# Altium PCB SensorBoard.PcbDoc
Units mm, origin at the board's own origin, x right, y up, seen from the top; angles counter-clockwise.
Board outline 114.43 x 32.64 mm, 4 copper layers (Top Layer, DGND, Power, Bottom Layer), stack 1.509 mm thick; 66 components, 54 nets, 245 pads, 243 vias.
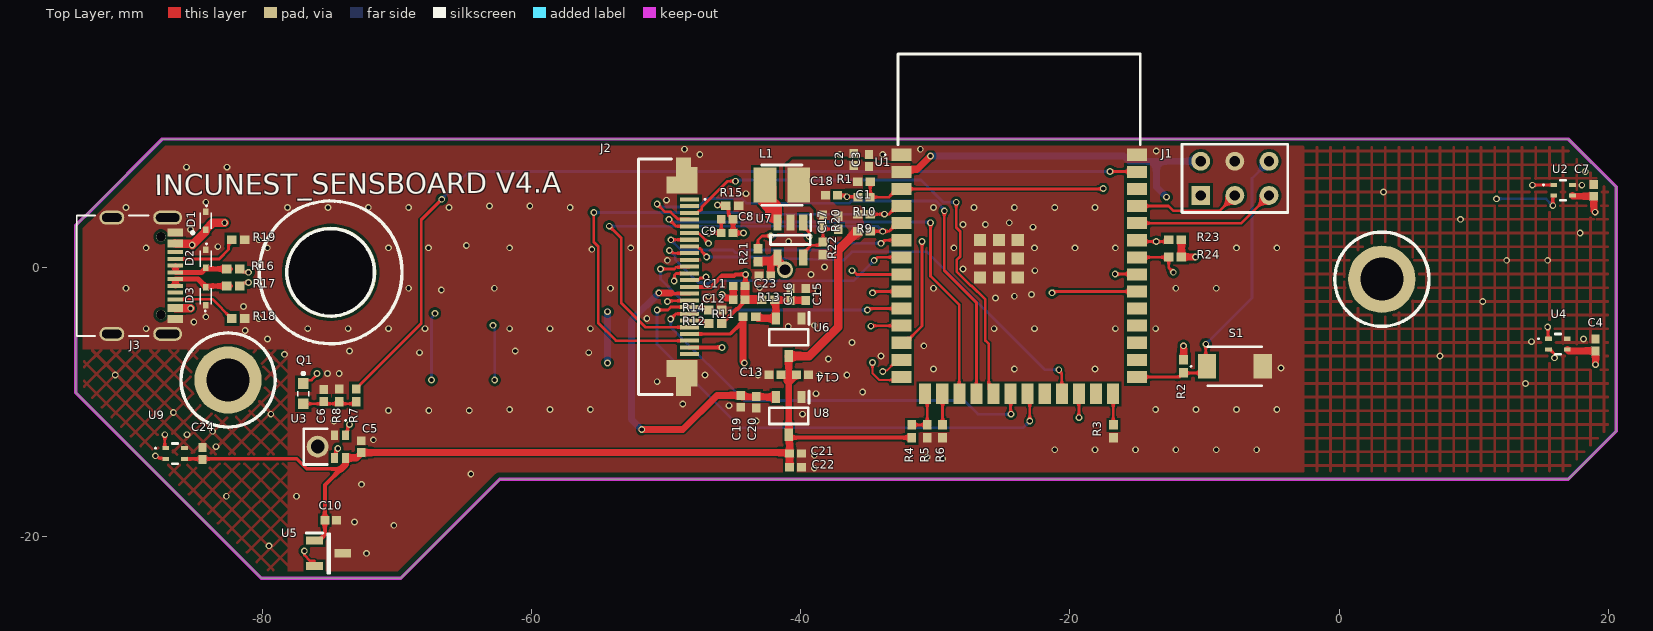
[diagram p0: Top Layer view]
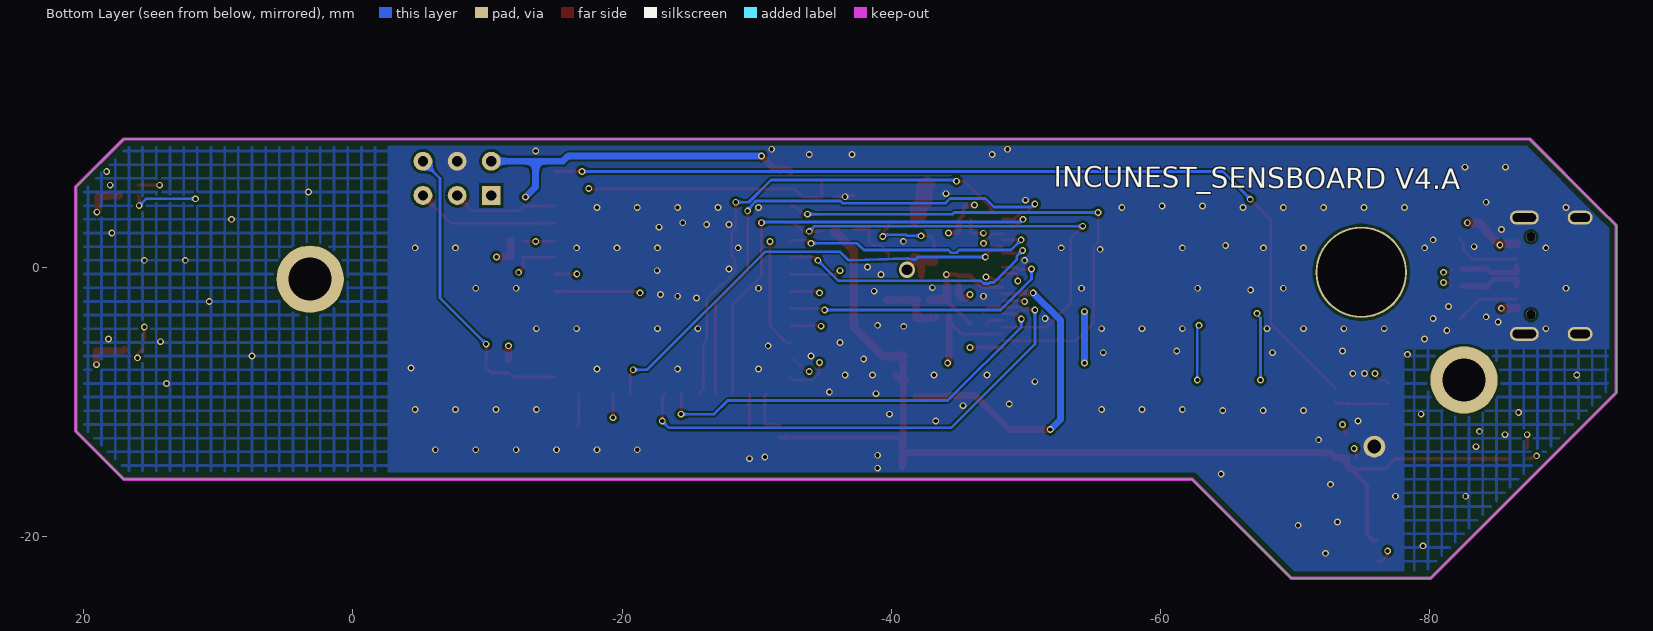
[diagram p1: Bottom Layer view, seen from below]
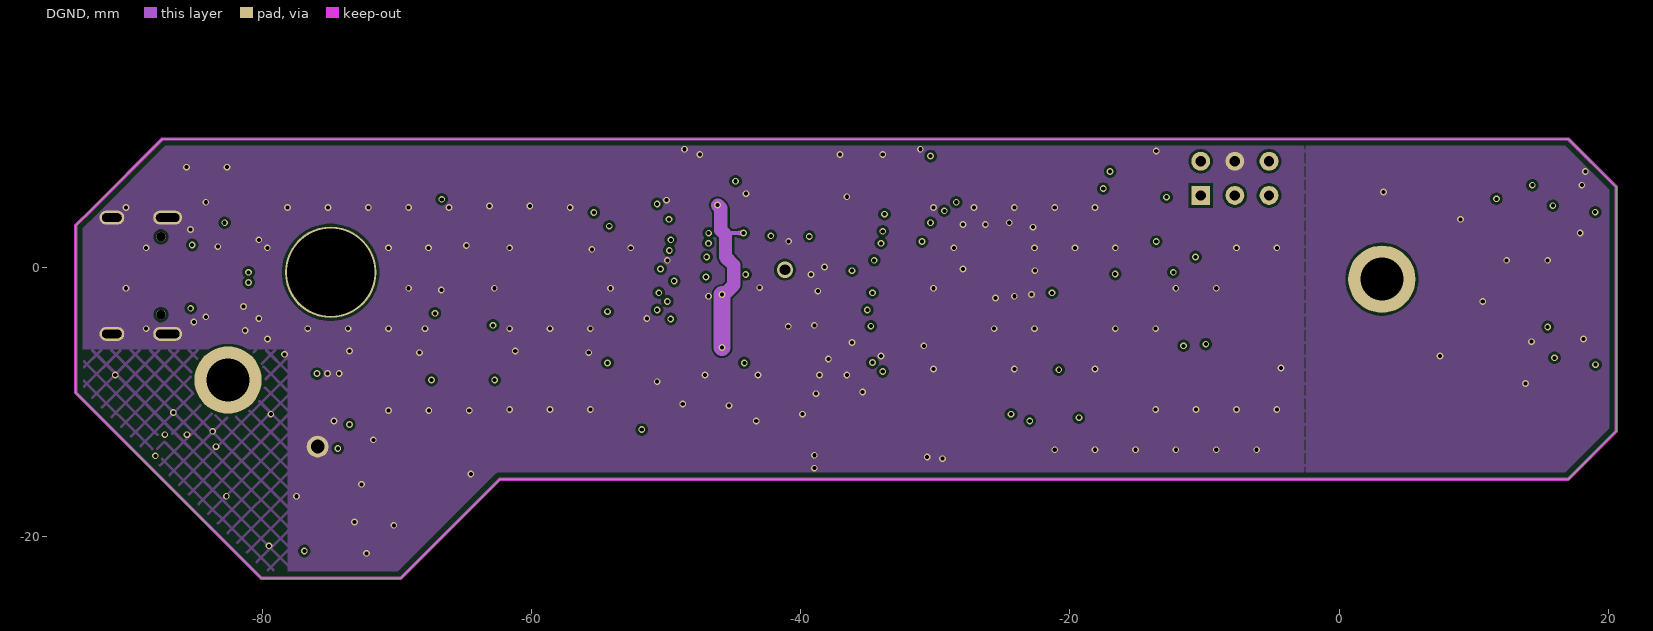
[diagram p2: DGND]
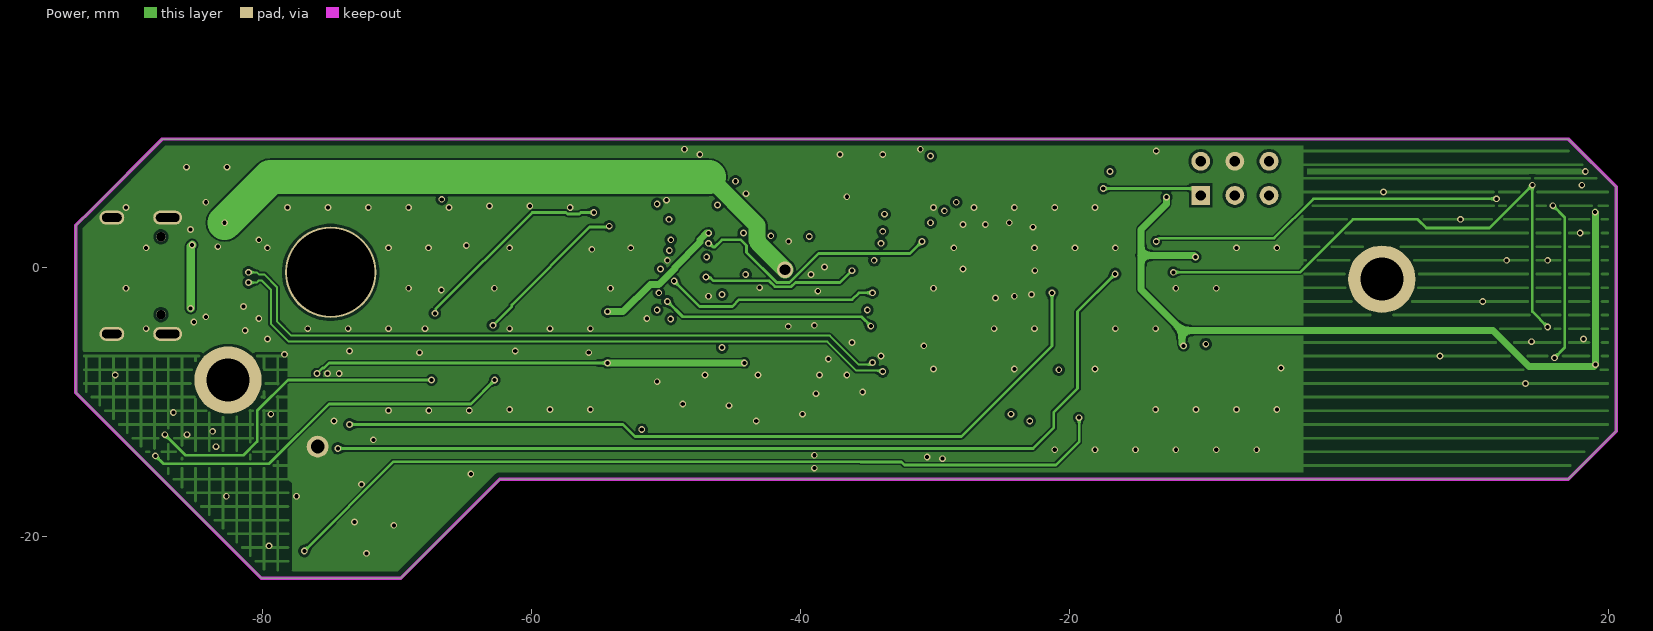
[diagram p3: Power]

## Layer stack, top to bottom
Top Solder: solder mask 0.0102, Solder Resist, Dk 3.5
Top Layer: signal copper 0.0356
Dielectric 2: prepreg 0.0711, PP-006, Dk 4.1
DGND: signal copper 0.0152
Dielectric 1: dielectric 1.265, FR-4, Dk 4.8
Power: signal copper 0.0152
Dielectric 3: prepreg 0.0711, PP-006, Dk 4.1
Bottom Layer: signal copper 0.0356
Bottom Solder: solder mask 0.0102, Solder Resist, Dk 3.5

## Board outline
-93.853,-9.335 -93.853,3.111 -92.647,4.318 -87.439,9.525 17.018,9.525 20.574,5.969 20.574,-12.192 17.018,-15.748 -62.357,-15.748 -69.723,-23.114 -80.074,-23.114 -87.439,-15.748 -92.647,-10.541

## Design rules (kind name [scope] priority, off if disabled: settings)
AssemblyTestPointUsage AssemblyTestPointUsage_1 [All] p2:
AssemblyTestpoint AssemblyTestpoint_1 [All] p2: testpointundercomponent=TRUE minsize=1.016 maxsize=2.54 preferedsize=1.524 minholesize=0 maxholesize=1.016 preferedholesize=0.813 testpointgrid=0.025 usegrid=TRUE gridtolerance=0 allowsidetop=TRUE allowsidebottom=TRUE
Clearance "Board outline clearance" [All vs OnLayer('Keep-Out Layer')] p1: gap=0.381 ignorepadtopadclearanceinfootprint=FALSE except(0: Arc-Hole Track-Hole SMDPad-Hole THPad-Hole Via-Hole Fill-Hole Poly-Hole Region-Hole Text-Hole)
Clearance Clearance_1 [All] p2: gap=0.2 ignorepadtopadclearanceinfootprint=FALSE except(0: Arc-Text Track-Text SMDPad-Text THPad-Text Via-Text Fill-Text Poly-Text Region-Text Text-Text; 0.102: Arc-Arc Arc-Track Arc-SMDPad Track-Track Track-SMDPad; 0.127: Arc-THPad Arc-Via Arc-Fill Arc-Poly Arc-Region Arc-Hole Track-THPad Track-Via Track-Fill Track-Poly Track-Region Track-Hole SMDPad-Hole THPad-Hole; 0.152: SMDPad-SMDPad; 0.203: SMDPad-THPad THPad-THPad; 0.254: Via-Via)
ComponentClearance [InComponent('L1')] p1: gap=0 collisioncheckmode=3 verticalgap=0.254 showdistances=FALSE
ComponentClearance UFL [InComponent('RF_CON1')] p2: gap=0 collisioncheckmode=3 verticalgap=0.254 showdistances=FALSE
ComponentClearance ComponentClearance_1 [All] p3: gap=0.254 collisioncheckmode=3 verticalgap=0.254 showdistances=FALSE
DiffPairsRouting DiffPairsRouting_1 [InDifferentialPair('D')] p1: maxlimit=0.3 minlimit=0.127 mostfreqgap=0.3 toplayer_minwidth=0.102 toplayer_maxwidth=0.148 toplayer_prefwidth=0.127 midlayer1_minwidth=0.076 midlayer1_maxwidth=0.381 midlayer1_prefwidth=0.127 midlayer2_minwidth=0.076 midlayer2_maxwidth=0.381 midlayer2_prefwidth=0.127 bottomlayer_minwidth=0.102 bottomlayer_maxwidth=0.148 bottomlayer_prefwidth=0.127 impedanceprofiledriven=TRUE impedanceprofileid={7D7D2639-810E-47C2-98E1-721D41EDD626} maxuncoupledlength=12.7
FabricationTestPointUsage FabricationTestPointUsage_1 [All] p2: valid=0 allowmultiple=FALSE
FabricationTestpoint FabricationTestpoint_1 [All] p2: side=3 testpointundercomponent=TRUE minsize=1.016 maxsize=2.54 preferedsize=1.524 minholesize=0 maxholesize=1.016 preferedholesize=0.813 testpointgrid=0.025 allowsidetop=TRUE allowsidebottom=TRUE usegrid=TRUE gridtolerance=0
FanoutControl Fanout_LCC [IsLCC] p1: bgadir=Out bgaviamode=Centered fanoutstyle=Auto fanoutdirection=Alternating viagrid=0.025 // Fanout_LCC (Default Rule)
FanoutControl Fanout_BGA [IsBGA] p2: bgadir=Out bgaviamode=Centered fanoutstyle=Auto fanoutdirection=Alternating viagrid=0.025 // Fanout_BGA (Default Rule)
FanoutControl Fanout_Small [(CompPinCount < 5)] p3: bgadir=Out bgaviamode=Centered fanoutstyle=Auto fanoutdirection=OutThenIn viagrid=0.025 // Fanout_Small (Default Rule)
FanoutControl Fanout_SOIC [IsSOIC] p4: bgadir=Out bgaviamode=Centered fanoutstyle=Auto fanoutdirection=Alternating viagrid=0.025 // Fanout_SOIC (Default Rule)
FanoutControl Fanout_BGA_1 [IsBGA] p6: bgadir=Out bgaviamode=Centered fanoutstyle=Auto fanoutdirection=Alternating viagrid=0.025 // Fanout_BGA (Default Rule)
FanoutControl Fanout_LCC_1 [IsLCC] p7: bgadir=Out bgaviamode=Centered fanoutstyle=Auto fanoutdirection=Alternating viagrid=0.025 // Fanout_LCC (Default Rule)
FanoutControl Fanout_SOIC_1 [IsSOIC] p8: bgadir=Out bgaviamode=Centered fanoutstyle=Auto fanoutdirection=Alternating viagrid=0.025 // Fanout_SOIC (Default Rule)
FanoutControl Fanout_Small_1 [(CompPinCount < 5)] p9: bgadir=Out bgaviamode=Centered fanoutstyle=Auto fanoutdirection=OutThenIn viagrid=0.025 // Fanout_Small (Default Rule)
FanoutControl Fanout_Default_1 [All] p10: bgadir=Out bgaviamode=Centered fanoutstyle=Auto fanoutdirection=Alternating viagrid=0.025 // Fanout_Default (Default Rule)
Height Height_1 [All] p1: minheight=0 maxheight=50 prefheight=12.7
HoleSize HoleSize_1 [All] p1: absolutevalues=TRUE maxlimit=15 minlimit=0.2 maxpercent=80.000 minpercent=20.000
HoleToHoleClearance u8 [All vs InComponent('u8_1')] p1: gap=0 allowstackedmicrovias=TRUE
HoleToHoleClearance [All] p2: gap=0.254 allowstackedmicrovias=TRUE
LayerPairs LayerPairs_1 [All] p1: enforce=TRUE
MinimumAnnularRing [All] p1: minimumring=0.1
MinimumSolderMaskSliver MinimumSolderMaskSliver_1 [All] p1 off: minsoldermaskwidth=0.2
NetAntennae NetAntennae_1 [All] p2: netantennaetolerance=0
PasteMaskExpansion PasteMaskExpansion_1 [All] p2: expansion=0
PlaneClearance PlaneClearance_1 [All] p1: clearance=0.508
PlaneConnect PlaneConnect_1 [All] p1: planeconnectstyle=Direct reliefexpansion=0.508 reliefentries=4 reliefconductorwidth=0.7 reliefairgap=0.254
PolygonConnect [All] p1: connectstyle=Direct reliefconductorwidth=0.508 reliefentries=4 polygonreliefangle="90 Angle" airgapwidth=0.254
RoutingCorners RoutingCorners_1 [All] p2: cornerstyle=45-Degree minsetback=2.54 maxsetback=2.54
RoutingLayers RoutingLayers_1 [All] p2: top layer_v5=TRUE mid layer 1_v5=TRUE mid layer 2_v5=TRUE bottom layer_v5=TRUE
RoutingPriority RoutingPriority_1 [All] p2: routingpriority=0
RoutingTopology RoutingTopology_1 [All] p2: topology=Shortest
RoutingVias RoutingVias_1 [All] p1: holewidth=0.3 width=0.5 viastyle="Through Hole" minholewidth=0.2 minwidth=0.4 maxholewidth=0.711 maxwidth=1.27
ShortCircuit ShortCircuit_Antenna [InComponent('J1')] p1: allowed=TRUE
ShortCircuit ShortCircuit_1 [All] p2: allowed=FALSE
SilkToSilkClearance SilkToSilkClearance_1 [All] p1: silktosilkclearance=0
SilkToSolderMaskClearance SilkToSolderMaskClearance_1 [IsPad] p1: minsilkscreentomaskgap=0 clearancetoexposedcopper=TRUE
SolderMaskExpansion [All] p1: expansion=0.102 istentingtop=FALSE
SolderMaskExpansion SolderMaskExpansion_1 [All] p2: expansion=0.102 istentingtop=FALSE
SupplyNets "Schematic Supply Nets_10" [InNet('2v8_ANA@150mA')] p1: voltage=0.000
SupplyNets "Schematic Supply Nets_9" [InNet('3v3_dig@2A')] p2: voltage=0.000
SupplyNets "Schematic Supply Nets_8" [InNet('1v5_dig@60mA')] p3: voltage=0.000
SupplyNets "Schematic Supply Nets_7" [InNet('AGND')] p4: voltage=0.000
SupplyNets "Schematic Supply Nets_6" [InNet('5V@2A')] p5: voltage=0.000
SupplyNets "Schematic Supply Nets_5" [InNet('2v8_dig@150mA')] p6: voltage=0.000
SupplyNets "Schematic Supply Nets_4" [InNet('2v8_DO_dig@150mA')] p7: voltage=0.000
SupplyNets "Schematic Supply Nets" [InNet('DGND')] p8: voltage=0.000
UnRoutedNet UnRoutedNet_1 [All] p1:
UnpouredPolygon UnpouredPolygon_1 [All] p2:
Width Width_1 [All] p1: maxlimit=8 minlimit=0.1 preferedwidth=0.2
13 further rules are at their usual default settings.

## Classes and differential pairs
component class U_Sensors: C4 C5 C6 C7 C8 C9 C10 C11 C12 C24 J2 Q1 R7 R8 R9 R10 R11 R12 R13 R14 R15 R23 R24 U2 U3 U4 U5 U9
component class U_PowerManagement: C13 C14 C15 C16 C17 C18 C19 C20 C21 C22 C23 C96 C97 D1 D2 D3 J3 L1 R16 R17 R18 R19 R20 R21 R22 U6 U7 U8
differential pair class USB: D USB
component class U_uC: C1 C2 C3 J1 R1 R2 R3 R4 R5 R6 S1 U1
differential pair USB: +USB_P -USB_N
differential pair D: +D_P -D_N

## Components (designator, comment, footprint, x,y, rotation, side; value= is the part's Value field where it differs from the comment)
C1 "1uF 0402 X5R 50V" CAPC1005X55X25NL5T10 -35.306,5.207 r0 top
C2 "10uF 0402 X5R 10V" CAPC1005X55X25NL5T10 -36.068,8.001 r270 top
C3 "100nF 0402 X7R 50V" CAPC1005X55X25NL5T10 -34.925,7.933 r270 top
C4 "100nF 0402 X7R 50V" CAPC1005X55X25NL5T10 19.05,-5.774 r270 top
C5 "100nF 0402 X7R 50V" CAPC1005X55X25NL5T10 -72.644,-13.335 r270 top
C6 "100nF 0402 X7R 50V" CAPC1005X55X25NL5T10 -75.438,-9.525 r90 top
C7 "100nF 0402 X7R 50V" CAPC1005X55X25NL5T10 18.923,5.715 r270 top
C8 "100nF 0402 X7R 50V" CAPC1005X55X25NL5T10 -45.466,3.556 r180 top
C9 "10uF 0402 X5R 10V" CAPC1005X55X25NL5T10 -45.466,2.54 r0 top
C10 "100nF 0402 X7R 50V" CAPC1005X55X25NL5T10 -74.921,-18.797 r180 top
C11 "100nF 0402 X7R 50V" CAPC1005X55X25NL5T10 -44.577,-1.397 r0 top
C12 "10uF 0402 X5R 10V" CAPC1005X55X25NL5T10 -44.577,-2.413 r180 top
C13 "100nF 0402 X7R 50V" CAPC1005X55X25NL5T10 -41.91,-8.001 r0 top
C14 "1uF 0402 X5R 50V" CAPC1005X55X25NL5T10 -39.878,-8.001 r180 top
C15 "100nF 0402 X7R 50V" CAPC1005X55X25NL5T10 -39.624,-2.032 r270 top
C16 "1uF 0402 X5R 50V" CAPC1005X55X25NL5T10 -40.767,-2.032 r270 top
C17 "22pF 0402 X5R 10V" CAPC1005X55X25NL5T10 -38.354,3.429 r270 top
C18 "10uF 0402 X5R 10V" CAPC1005X55X25NL5T10 -37.719,5.334 r0 top
C19 "100nF 0402 X7R 50V" CAPC1005X55X25NL5T10 -44.45,-9.965 r90 top
C20 "1uF 0402 X5R 50V" CAPC1005X55X25NL5T10 -43.307,-10.033 r90 top
C21 "100nF 0402 X7R 50V" CAPC1005X55X25NL5T10 -40.386,-13.843 r180 top
C22 "1uF 0402 X5R 50V" CAPC1005X55X25NL5T10 -40.386,-14.859 r180 top
C23 "10uF 0402 X5R 10V" CAPC1005X55X25NL5T10 -42.672,-0.635 r180 top
C24 "100nF 0402 X7R 50V" CAPC1005X55X25NL5T10 -84.455,-13.843 r270 top
D1 "LESD5D5.0CT1G" LESD5D50CT1G -84.201,3.454 r270 top
D2 "LESD5D5.0CT1G" LESD5D50CT1G -84.201,0.635 r270 top
D3 "LESD5D5.0CT1G" LESD5D50CT1G -84.201,-2.159 r90 top
J1 "Samtec SLW-103-01-T-D" PCB-37z8hw1ej4f71bosen9e-1 -10.287,5.334 r90 top
J2 "SFV24R-1STE1HLF" SFV24R1STE1HLF -49.96,-0.71 r270 top
J3 "KH-TYPE-C-16P" KINGHELM_KH-TYPE-C-16P -91.186,-0.635 r270 top
L1 "SWPA3015S2R2NT" INDPM3030X150N -41.402,6.096 r0 top
Q1 "ALS-PT19-315C_L177_TR8" ALSPT19315CL177TR8 -76.962,-9.398 r270 top
R1 "10k 0402 0.1%" RESC1005X40X25ML05T10 -35.306,6.35 r180 top
R2 "10k 0402 0.1%" RESC1005X40X25ML05T10 -11.557,-7.366 r90 top
R3 "10k 0402 0.1%" RESC1005X40X25ML05T10 -16.764,-12.192 r90 top
R4 "10k 0402 0.1%" RESC1005X40X25ML05T10 -31.75,-12.192 r270 top
R5 "0R 0402 1%" RESC1005X40X25ML05T10 -30.607,-12.192 r270 top
R6 "10k 0402 0.1%" RESC1005X40X25ML05T10 -29.464,-12.192 r90 top
R7 "1k 0402 1%" RESC1005X40X25ML05T10 -73.025,-9.525 r90 top
R8 "100k 0402 1%" RESC1005X40X25ML05T10 -74.295,-9.525 r90 top
R9 "4k7 0402 1%" RESC1005X40X25ML05T10 -35.306,2.667 r0 top
R10 "4k7 0402 1%" RESC1005X40X25ML05T10 -35.306,3.937 r0 top
R11 "0R 0402 1%" RESC1005X40X25ML05T10 -43.815,-3.683 r0 top
R12 "10k 0402 0.1%" RESC1005X40X25ML05T10 -46.355,-4.191 r0 top
R13 "0R 0402 1%" RESC1005X40X25ML05T10 -42.418,-2.413 r0 top
R14 "10k 0402 0.1%" RESC1005X40X25ML05T10 -46.355,-3.175 r0 top
R15 "0R 0402 1%" RESC1005X40X25ML05T10 -45.085,4.572 r180 top
R16 "33R 0402 1%" RESC1005X40X25ML05T10 -82.169,-0.127 r0 top
R17 "33R 0402 1%" RESC1005X40X25ML05T10 -82.169,-1.397 r0 top
R18 "5k1 0402 1%" RESC1005X40X25ML05T10 -81.788,-3.81 r180 top
R19 "5k1 0402 1%" RESC1005X40X25ML05T10 -81.788,2.032 r180 top
R20 "680k 0402 1%" RESC1005X40X25ML05T10 -37.211,3.302 r270 top
R21 "10k 0402 1%" RESC1005X40X25ML05T10 -43.18,0.889 r90 top
R22 "150k 0402 1%" RESC1005X40X25ML05T10 -38.354,1.397 r270 top
R23 "4k7 0402 1%" RESC1005X40X25ML05T10 -12.192,2.032 r180 top
R24 "4k7 0402 1%" RESC1005X40X25ML05T10 -12.192,0.762 r180 top
S1 "TS-1088-AR02016" TS1088AR02016 -7.747,-7.366 r0 top
U1 "ESP32-S3-WROOM-1-N16R8" ESP32S3WROOM1N16R8 -23.776,3.095 r0 top
U2 "SHT40-AD1B-R3" SHT40AD1BR3 16.637,5.715 r0 top
U3 "ICS-41350" ICS41352 -75.184,-13.335 r180 top
U4 "SHT40-CD1B-R3" SHT40CD1BR3 16.256,-5.715 r0 top
U5 "DRV5032FBDBZR" SOT95P237X95-3N -75.073,-21.255 r0 top
U6 "XC6206P282MR-G" SOT95P280X130-3N -40.894,-5.207 r270 top
U7 "SY8088AAC" SOT95P285X140-5N -40.767,2.032 r270 top
U8 "XC6206P152MR-G" SOT95P280X130-3N -40.894,-11.049 r270 top
U9 "SHT40-AD1B-R3" SHT40AD1BR3 -86.487,-13.843 r0 top

## Footprints (in the part's own frame and the unit in brackets; to place one, negate y for a bottom-side part, rotate by r counter-clockwise, add the part's x,y. Pads: shape width x height; smd on the part's side, far side on the other; paste and mask are expansions set on the pad)
ALSPT19315CL177TR8 [mm]
  rect 0.8x0.8 smd: 1(-0.75,0) 2(0.75,0)
  silkscreen extent -1.6,-0.4 0.2,0.4, body extent -0.81,-0.4 0.89,0.4, height 0.6
CAPC1005X55X25NL5T10 [mm] "Chip Capacitor, 2-Leads, Body 1.05x0.55mm, IPC Medium Density"
  rect 0.66x0.62 smd: 1(-0.44,0) 2(0.44,0)
  body extent -0.53,-0.28 0.53,0.28, height 0.55
ESP32S3WROOM1N16R8 [mm]
  rect 1.5x0.9 smd: 1(-8.75,5.26) 2(-8.75,3.99) 3(-8.75,2.72) 4(-8.75,1.45) 5(-8.75,0.18) 6(-8.75,-1.09) 7(-8.75,-2.36) 8(-8.75,-3.63) 9(-8.75,-4.9) 10(-8.75,-6.17) 11(-8.75,-7.44) 12(-8.75,-8.71) 13(-8.75,-9.98) 14(-8.75,-11.25) 27(8.75,-11.25) 28(8.75,-9.98) 29(8.75,-8.71) 30(8.75,-7.44) 31(8.75,-6.17) 32(8.75,-4.9) 33(8.75,-3.63) 34(8.75,-2.36) 35(8.75,-1.09) 36(8.75,0.18) 37(8.75,1.45) 38(8.75,2.72) 39(8.75,3.99) 40(8.75,5.26)
  rect 0.9x1.5 smd: 15(-6.985,-12.5) 16(-5.715,-12.5) 17(-4.445,-12.5) 18(-3.175,-12.5) 19(-1.905,-12.5) 20(-0.635,-12.5) 21(0.635,-12.5) 22(1.905,-12.5) 23(3.175,-12.5) 24(4.445,-12.5) 25(5.715,-12.5) 26(6.985,-12.5)
  rect 0.9x0.9 smd: 41(-1.5,-2.46) 42(-2.9,-1.06) 43(-2.9,-2.46) 44(-2.9,-3.86) 45(-1.5,-3.86) 46(-0.1,-3.86) 47(-0.1,-2.46) 48(-0.1,-1.06) 49(-1.5,-1.06)
  silkscreen extent -10,5.21 9,12.75, body extent -9,-12.75 9,12.75, height 3.25
ICS41352 [mm]
  rect 0.522x0.725 smd: 1(-1.364,-0.842) 2(-0.542,-0.842) 4(-0.542,0.833) 5(-1.364,0.833)
  round 1.625 hole 1.025: 3(0.71,-0.005)
  silkscreen extent -1.41,-2 1.75,1.33, body extent -1.75,-1.33 1.75,1.33, height 0.95
INDPM3030X150N [mm]
  rect 1.7x2.6 smd: 1(-1.25,0) 2(1.25,0)
  silkscreen extent -1.5,-1.5 1.5,1.5, body extent -1.5,-1.5 1.5,1.5, height 1.5
KINGHELM_KH-TYPE-C-16P [mm]
  rect 0.6x1.15 smd: A1_B12(-3.2,4.725) A4_B9(-2.4,4.725) A9_B4(2.4,4.725) A12_B1(3.2,4.725)
  rect 0.3x1.15 smd: A5(-1.25,4.725) A6(-0.25,4.725) A7(0.25,4.725) A8(1.25,4.725) B5(1.75,4.725) B6(0.75,4.725) B7(-0.75,4.725) B8(-1.75,4.725)
  oval 1.05x1.85 hole 0.65 slot 1.45 at 90 deg: SH1(-4.32,0) SH2(4.32,0)
  oval 1.05x2.15 hole 0.65 slot 1.75 at 90 deg: SH3(-4.32,4.15) SH4(4.32,4.15)
  round 0.7 hole 0.7 unplated: ""(-2.89,3.65) ""(2.89,3.65)
  silkscreen extent -4.47,-2.6 4.47,6.1, body extent -4.47,-3.91 4.47,3.91, height 3.41
LESD5D50CT1G [mm]
  rect 0.48x0.4 smd: 1(-0.66,0) 2(0.66,0)
  silkscreen extent -1.15,-0.4 0.6,0.4, body extent -0.8,-0.4 0.8,0.4, height 0.6
PCB-37z8hw1ej4f71bosen9e-1 [mm]
  rect 1.4x1.4 hole 0.762: 1(0,0)
  round 1.4 hole 0.762: 2(2.54,0) 3(0,-2.54) 4(2.54,-2.54) 5(0,-5.08) 6(2.54,-5.08)
  silkscreen extent -1.27,-6.48 3.81,1.4, body extent -1.21,-6.35 3.75,1.27, height 4.57
RESC1005X40X25ML05T10 [mm] "Chip Resistor, 2-Leads, Body 1.00x0.50mm, IPC Low Density"
  rect 0.7x0.65 smd: 1(-0.475,0) 2(0.475,0)
  body extent -0.53,-0.27 0.53,0.28, height 0.4
SFV24R1STE1HLF [mm]
  rect 0.3x1.4 smd: 1(-5.75,1.7) 2(-5.25,1.7) 3(-4.75,1.7) 4(-4.25,1.7) 5(-3.75,1.7) 6(-3.25,1.7) 7(-2.75,1.7) 8(-2.25,1.7) 9(-1.75,1.7) 10(-1.25,1.7) 11(-0.75,1.7) 12(-0.25,1.7) 13(0.25,1.7) 14(0.75,1.7) 15(1.25,1.7) 16(1.75,1.7) 17(2.25,1.7) 18(2.75,1.7) 19(3.25,1.7) 20(3.75,1.7) 21(4.25,1.7) 22(4.75,1.7) 23(5.25,1.7) 24(5.75,1.7)
  rect 1.95x0.5 smd: MP1(-7.175,2.05) MP6(7.175,2.05)
  rect 2.65x1.1 smd: MP2(-7.525,1.25) MP5(7.525,1.25)
  rect 1.25x0.7 smd: MP3(-6.825,0.35) MP4(6.825,0.35)
  silkscreen extent -8.75,-2.1 8.75,2.9, body extent -8.75,-2.7 8.75,2.2, height 1.87
SHT40AD1BR3 [mm]
  rect 0.5x0.3 smd: 1(-0.7,0.4) 2(-0.7,-0.4) 3(0.7,-0.4) 4(0.7,0.4)
  silkscreen extent -1.5,-0.75 0.2,0.75, body extent -0.75,-0.75 0.75,0.75, height 0.54
SHT40CD1BR3 [mm]
  rect 0.5x0.3 smd: 1(-0.7,0.4) 2(-0.7,-0.4) 3(0.7,-0.4) 4(0.7,0.4)
  silkscreen extent -1.5,-0.75 0.2,0.75, body extent -0.75,-0.75 0.75,0.75, height 0.69
SOT95P237X95-3N [mm]
  rect 1.25x0.6 smd: 1(-1.05,0.95) 2(-1.05,-0.95) 3(1.05,0)
  silkscreen extent -1.68,-1.46 0.08,1.5, body extent -1.27,-1.46 1.27,1.46, height 1
SOT95P280X130-3N [mm]
  rect 0.9x0.6 smd: 1(-1.4,0.95) 2(-1.4,-0.95) 3(1.4,0)
  silkscreen extent -1.85,-1.45 0.6,1.5, body extent -1.4,-1.45 1.4,1.45, height 1.3
SOT95P285X140-5N [mm]
  rect 1.2x0.6 smd: 1(-1.3,0.95) 2(-1.3,0) 3(-1.3,-0.95) 4(1.3,-0.95) 5(1.3,0.95)
  silkscreen extent -1.9,-1.48 0.35,1.5, body extent -1.43,-1.48 1.43,1.48, height 1.4
TS1088AR02016 [mm]
  rect 1.35x1.8 smd: 1(-2.075,0) 2(2.075,0)
  silkscreen extent -3.3,-1.45 2,1.45, body extent -2.62,-1.45 2.62,1.45, height 2.1

## Part data
C1 C14 C16 C20 C22: library part CMP-1662-00020-1, LCSC_PN=C1518208, ComponentLink1Description="Manufacturer URL", ComponentLink1URL=http://www.murata.com/, ComponentLink2Description=Datasheet, ComponentLink2URL=http://psearch.en.murata.com/capacitor/product/GRM155R60J105KE19%23.pdf
C2 C9 C12 C18 C23: library part CMP-1662-00020-1, LCSC_PN=C77000, ComponentLink1Description="Manufacturer URL", ComponentLink1URL=http://www.murata.com/, ComponentLink2Description=Datasheet, ComponentLink2URL=http://psearch.en.murata.com/capacitor/product/GRM155R60J105KE19%23.pdf
C3 C4 C5 C6 C7 C8 C10 C11 C13 C15 C19 C21 C24: library part CMP-1662-00020-1, LCSC_PN=C77020, ComponentLink1Description="Manufacturer URL", ComponentLink1URL=http://www.murata.com/, ComponentLink2Description=Datasheet, ComponentLink2URL=http://psearch.en.murata.com/capacitor/product/GRM155R60J105KE19%23.pdf
C17: library part CMP-1662-00020-1, LCSC_PN=C106203, ComponentLink1Description="Manufacturer URL", ComponentLink1URL=http://www.murata.com/, ComponentLink2Description=Datasheet, ComponentLink2URL=http://psearch.en.murata.com/capacitor/product/GRM155R60J105KE19%23.pdf
D1 D2 D3: "TVS Diode (Bi-directional)", LCSC_PN=C5274290, Manufacturer_Name=LRC, Height=0.7mm, Manufacturer_Part_Number=LESD5D5.0CT1G
J1: library part CMP-bcf575fbeff46332-1, "Dual Row Connector Female Samtec SLW-103-01-T-D", Color=Black, LCSC_PN=C492420, Manufacturer Part Number=SLW-103-01-T-D, Operating Temperature="105 °C (max)", Voltage Rating (AC)="400 V", Contact Material="Phosphor Bronze", Contact Plating=Tin, Gender=Female, Housing Color=Black, Housing Material=Plastic, Lead-Free Status="Lead Free", Mounting Style="Through Hole, Vertical", Number of Contacts=6, Number of Positions=6, Number of Rows=2, Octopart URL=https://octopart.com/slw-103-01-t-d-samtec-292455, OctopartID=bcf575fbeff46332, Packaging=Tube, Pin Pitch="2.54 mm", REACH SVHC Compliance="No SVHC", RoHS=Compliant, Size-Height="4.57 mm", Size-Length="7.62 mm", Size-Width="4.95 mm"
J2: "Connector", LCSC_PN=C599469, Manufacturer_Name="Amphenol Communications Solutions", Datasheet Link=https://cdn.amphenol-cs.com/media/wysiwyg/files/drawing/10112793.pdf, Height=2mm, Manufacturer_Part_Number=SFV24R-1STE1HLF
J3: LCSC_PN=C709357, Package=None, Check_prices=https://www.snapeda.com/parts/KH-TYPE-C-16P/Kinghelm/view-part/?ref=eda, MF=kinghelm, MP=KH-TYPE-C-16P, SnapEDA_Link=https://www.snapeda.com/parts/KH-TYPE-C-16P/Kinghelm/view-part/?ref=snap
L1: "Inductor", LCSC_PN=C19734, Manufacturer_Name=SUNLORD, Datasheet Link=https://www.datasheets360.com/pdf/-6416416511052712578, Height=1.5mm, Manufacturer_Part_Number=SWPA3015S2R2NT
Q1: "Phototransistor", Arrow Part Number=ALS-PT19-315C/L177/TR8, LCSC_PN=C146233, Manufacturer_Name=Everlight, Mouser Part Number=638-ALSPT19315CL177, Arrow Price/Stock=https://www.arrow.com/en/products/als-pt19-315cl177tr8/everlight-electronics?utm_currency=USD&region=europe, Datasheet Link=https://www.digikey.ph/en/products/detail/everlight-electronics-co-ltd/ALS-PT19-315C-L177-TR8/2675735?srsltid=AfmBOopkZAWRkSRGF2QkCTJg8jlOMXuDkqdJQuZk5-RcBTTXcrGGKyht, Height=0mm, Manufacturer_Part_Number=ALS-PT19-315C/L177/TR8, Mouser Price/Stock=https://www.mouser.co.uk/ProductDetail/Everlight/ALS-PT19-315C-L177-TR8?qs=8PzhAHr7IdN7OeHhwLrtPw%3D%3D
R1 R2 R3 R4 R6 R12 R14: library part CMP-2002-07472-1, LCSC_PN=C190095
R5 R11 R13 R15: library part CMP-2002-07472-1, LCSC_PN=C60485
R7: library part CMP-2002-07472-1, LCSC_PN=C106235
R8: library part CMP-2002-07472-1, LCSC_PN=C60491
R9 R10 R23 R24: library part CMP-2002-07472-1, LCSC_PN=C105871
R16 R17: library part CMP-2002-07472-1, LCSC_PN=C138002
R18 R19: library part CMP-2002-07472-1, LCSC_PN=C105872
R20: library part CMP-2002-07472-1, LCSC_PN=C163456
R21: library part CMP-2002-07472-1, LCSC_PN=C60490
R22: library part CMP-2002-07472-1, LCSC_PN=C93947
S1: "Switch", LCSC_PN=C720477, Manufacturer_Name=XUNPU, Datasheet Link=https://www.xunpudianzi.com/uploads/pdf/TS-1088-ARXXX.pdf, Height=2mm, Manufacturer_Part_Number=TS-1088-AR02016
U1: "Integrated Circuit", LCSC_PN=C2913202, Manufacturer_Name="Espressif Systems", Mouser Part Number=356-ESP32S3WRM1N16R8, Datasheet Link=https://www.espressif.com/sites/default/files/documentation/esp32-s3-wroom-1_wroom-1u_datasheet_en.pdf, Height=3.25mm, Manufacturer_Part_Number=ESP32-S3-WROOM-1-N16R8, Mouser Price/Stock=https://www.mouser.co.uk/ProductDetail/Espressif-Systems/ESP32-S3-WROOM-1-N16R8?qs=Li%252BoUPsLEnvQc9gW6AMhZg%3D%3D
U2 U9: "Integrated Circuit", LCSC_PN=C2848306, Manufacturer_Name=Sensirion, Mouser Part Number=403-SHT40-AD1B-R3, Arrow Part Number=SHT40-AD1B-R3, Arrow Price/Stock=https://www.arrow.com/en/products/sht40-ad1b-r3/sensirion-ag?utm_currency=USD&region=asia, Datasheet Link=https://www.arrow.com/en/products/sht40-ad1b-r3/sensirion-ag, Height=0.59mm, Manufacturer_Part_Number=SHT40-AD1B-R3, Mouser Price/Stock=https://www.mouser.co.uk/ProductDetail/Sensirion/SHT40-AD1B-R3?qs=zW32dvEIR3sa7U6cFW6pBw%3D%3D
U3: "Integrated Circuit", LCSC_PN=C3171856, Manufacturer_Name=TDK, Mouser Part Number=410-ICS-41350, Arrow Part Number=ICS-41350, Arrow Price/Stock=https://www.arrow.com/en/products/ics-41350/invensense.html?utm_currency=USD&region=nac, Datasheet Link=https://product.tdk.com/system/files/dam/doc/product/sw_piezo/mic/mems-mic/data_sheet/ds-000048-ics-41352-data-sheet-v1.0.pdf, Height=1.13mm, Manufacturer_Part_Number=ICS-41350, Mouser Price/Stock=https://www.mouser.co.uk/ProductDetail/TDK-InvenSense/ICS-41350?qs=u4fy%2FsgLU9MU%252BiFhvX73lg%3D%3D
U4: "Integrated Circuit", LCSC_PN=C7461852, Manufacturer_Name=Sensirion, Mouser Part Number=403-SHT40-CD1B-R3, Arrow Part Number=SHT40-CD1B-R3, Arrow Price/Stock=https://www.arrow.com/en/products/sht40-cd1b-r3/sensirion-ag?utm_currency=USD&region=nac, Datasheet Link=https://sensirion.com/media/documents/33FD6951/6555C40E/Sensirion_Datasheet_SHT4x.pdf, Height=0.59mm, Manufacturer_Part_Number=SHT40-CD1B-R3, Mouser Price/Stock=https://www.mouser.co.uk/ProductDetail/Sensirion/SHT40-CD1B-R3?qs=ulEaXIWI0c%2FeyXO6eo5KrQ%3D%3D
U5: "Integrated Circuit", LCSC_PN=C2655033, Manufacturer_Name="Texas Instruments", Mouser Part Number=595-DRV5032FBDBZR, Arrow Part Number=DRV5032FBDBZR, Arrow Price/Stock=https://www.arrow.com/en/products/drv5032fbdbzr/texas-instruments?region=nac, Datasheet Link=http://www.ti.com/lit/gpn/drv5032, Height=0.95mm, Manufacturer_Part_Number=DRV5032FBDBZR, Mouser Price/Stock=https://www.mouser.co.uk/ProductDetail/Texas-Instruments/DRV5032FBDBZR?qs=u4fy%2FsgLU9MVJlgotSzybA%3D%3D
U6: "Integrated Circuit", LCSC_PN=C347374, Manufacturer_Name=Torex, Mouser Part Number=865-XC6206P282MR-G, Datasheet Link=https://www.torexsemi.com/file/xc6206/XC6206.pdf, Height=1.3mm, Manufacturer_Part_Number=XC6206P282MR-G, Mouser Price/Stock=https://www.mouser.co.uk/ProductDetail/Torex-Semiconductor/XC6206P282MR-G?qs=AsjdqWjXhJ%2Fpd3DOBopSeA%3D%3D
U7: "Integrated Circuit", LCSC_PN=C79313, Manufacturer_Name=Silergy, Datasheet Link=https://lcsc.com/product-detail/DC-DC-Converters_Silergy_SY8088AAC_SY8088AAC_C79313.html, Height=1.4mm, Manufacturer_Part_Number=SY8088AAC
U8: "Integrated Circuit", LCSC_PN=C424701, Manufacturer_Name=Torex, Mouser Part Number=865-XC6206P152MR-G, Datasheet Link=https://www.torexsemi.com/file/xc6206/XC6206.pdf, Height=1.3mm, Manufacturer_Part_Number=XC6206P152MR-G, Mouser Price/Stock=https://www.mouser.co.uk/ProductDetail/Torex-Semiconductor/XC6206P152MR-G?qs=AsjdqWjXhJ%2FTdxm%252B3lQcfQ%3D%3D

## Free pads (board coordinates)
  round 5 hole 3.2: 0(-82.55,-8.382) 0(3.175,-0.889)
  round 6.8 hole 6.5: 0(-74.93,-0.381)

## Via types
v1: diameter 0.5, hole 0.3, Top Layer to Bottom Layer, tented both sides, 233 vias
v2: diameter 0.5, hole 0.3, Top Layer to Bottom Layer, 9 vias
v3: diameter 1.2, hole 0.8, Top Layer to Bottom Layer, tented both sides, 1 vias

## Nets (pads, with @x,y where several pads share a name; then routed paths per layer and width w, separated by ;. In a path a pad name is that pad's centre, name@x,y a point inside that pad or via, vN(x,y) a via of type N, cw(c..) or ccw(c..) an arc to the next point about the centre after c; other vN are vias at no path point)
1v5_dig@60mA: C19.2 C20.2 J2.15 U8.2 | length 24.7
  Top Layer w0.254: -49.64,-1.905 -49.585,-1.96 J2.15
  Top Layer w0.508: v1(-51.816,-12.065) -48.768,-12.065 -46.228,-9.525 C19.2 -44.45,-9.545 -44.346,-9.649 U8.2 ; v1(-50.546,-1.905) -49.64,-1.905
  Bottom Layer w0.508: v1(-51.816,-12.065) -52.578,-11.303 -52.578,-3.937 v1(-50.546,-1.905)
2v8_ANA@150mA: C8.2 C9.1 J2.21 Q1.1 R11.1 | length 57.1
  Top Layer w0.203: Q1.1 -76.707,-8.393 -76.338,-8.393 -76.338,-8.381 -75.946,-7.988 v1(-75.946,-7.903) ; v1(-46.839,2.532) -45.914,2.532 C9.1 C8.2
  Top Layer w0.254: J2.21 -45.219,-4.96 -44.29,-4.031
  Top Layer w0.508: R11.1 -44.29,-4.031 -44.29,-7.018 v1(-44.196,-7.112)
  Power w0.203: v1(-75.946,-7.903) -75.531,-7.488 -75.433,-7.488 -75.057,-7.112 v1(-54.356,-7.112)
  Power w0.508: v1(-54.356,-7.112) v1(-44.196,-7.112) ; v1(-54.356,-3.302) -53.21,-3.302 -51.182,-1.274 -50.547,-1.274 -49.356,-0.084 -49.356,-0.007 -47.494,1.855 -47.494,2.039 -47.002,2.532 v1(-46.839,2.532)
  Bottom Layer w0.508: v1(-54.356,-7.112) v1(-54.356,-3.302)
2v8_dig@150mA: C15.2 C16.2 R11.2 R13.2 U6.2 | length 5.3
  Top Layer w0.508: R11.2 -43.315,-3.683 -43.191,-3.807 U6.2 -41.844,-2.512 -41.847,-2.509 -41.847,-2.484 R13.2@-41.888,-2.443 ; R13.2 -41.918,-2.413 R13.2@-41.888,-2.443 ; C15.2 -39.653,-2.443 R13.2@-41.888,-2.443
2v8_DO_dig@150mA: C11.2 C12.1 J2.14 R12.2 R13.1 | length 10.1
  Top Layer w0.305: J2.14 -46.672,-1.46 -45.847,-0.635 -44.953,-0.635 -44.855,-0.537 v1(-44.093,-0.537) ; R12.2 -45.855,-4.191 -44.768,-3.104 -44.709,-3.104 -44.315,-2.71 -44.315,-2.571 -44.157,-2.413 C12.1 ; C11.2 -44.115,-1.375 v1@-44.115,-0.636
  Top Layer w0.635: C11.2 C12.1 R13.1
3v3_dig@2A: C2.2 C3.2 C4.2 C5.2 C7.2 C10.2 C13.2 C14.2 C17.1 C18.1 C21.2 C22.2 C24.2 J1.2 L1.2 R1.2 R2.2 R4.2 R9.1 R10.1 R20.1 R23.1 R24.1 U1.2 U2.3 U3.5 U4.3 U5.1 U6.3 U8.3 U9.3 | length 178.7
  Top Layer w0.254: U9.3 -77.451,-14.243 -76.708,-14.986 -74.168,-14.986
  Top Layer w0.305: U5.1 -75.798,-20.305 -75.361,-19.868 C10.2 -75.361,-16.179 -74.168,-14.986 ; U8.3 -40.894,-12.519 -40.746,-12.667 R4.2
  Top Layer w0.508: -74.168,-14.986 -73.827,-14.645 -73.827,-14.175 U3.5 -73.017,-14.168 -72.644,-13.795 C5.2 -40.914,-13.775 -40.846,-13.843 C21.2 ; U8.3 -40.894,-8.557 ; U6.3 -40.894,-8.255 -41.045,-8.406 -40.894,-8.557 ; C22.2 C21.2 ; U8.3@-40.826,-12.667 C21.2 ; C14.2 -40.338,-8.001 -40.894,-8.557 ; U1.2 -32.33,7.281 -31.327,7.281 v1(-30.353,8.255) ; R23.1 R24.1 v1(-10.668,0.762) ; R2.2 v1(-11.557,-5.842) ; U4.3 17.055,-6.214 C4.2 v1(19.05,-7.239) ; U2.3 17.377,5.275 C7.2 18.923,4.193 v1(19.025,4.091)
  Top Layer w0.635: U6.3 -39.373,-6.607 -37.211,-4.445 -37.211,1.262 -35.806,2.667 R9.1
  Power w0.508: v1(-12.827,5.207) -12.827,4.699 -14.732,2.794 -14.732,0.874 ; v1(-11.557,-5.842) -11.684,-5.715 -11.684,-4.699 ; v1(-10.668,0.762) -10.78,0.874 -14.732,0.874 ; v1(19.025,4.091) 19.05,4.066 v1(19.05,-7.239) 18.923,-7.366 14.097,-7.366 11.43,-4.699 -11.684,-4.699 ; -14.732,0.874 -14.732,-1.651 -11.684,-4.699
  Bottom Layer w0.508: v1(-30.353,8.255) -16.002,8.255 -15.621,7.874 -13.578,7.874 ; v1(-12.827,5.207) -13.578,5.958 -13.578,7.874 ; J1.2 -13.578,7.874
5V@2A: C23.1 D1.2 J3.A4_B9 J3.A9_B4 R21.1 U7.4 | length 61.2
  Top Layer w0.508: C23.1 -42.232,0.123 -41.717,0.638 -41.717,0.728 U7.4
  Top Layer w0.635: J3.A9_B4 -86.448,-3.048 -85.471,-3.048 -85.465,-3.054 v1(-85.324,-3.054) ; J3.A4_B9 -86.443,1.747 -85.313,1.747 v1(-85.217,1.651) -84.201,2.667 D1.2 -83.693,3.302 v1(-82.804,3.302) ; R21.1 -43.18,0.439 -43.172,0.447 -41.999,0.447 U7.4@-41.717,0.728 ; U7.4@-41.717,0.638 -41.717,0.467 -41.178,-0.072 v3(-41.178,-0.187)
  Power w0.635: v1(-85.324,-3.054) -85.324,1.544 v1(-85.217,1.651)
  Power w1.27: -46.826,6.694 -43.238,3.106 -43.238,2.005 -43.187,1.955 -43.187,1.822 v3(-41.178,-0.187)
  Power w2.54: v1(-82.804,3.302) -79.412,6.694 -46.826,6.694
AGND: C8.1 C9.2 C11.1 C12.2 J2.23 R15.2 | length 20.8
  Top Layer w0.305: J2.23 -45.856,-5.96 v2(-45.847,-5.969) ; v1(-46.182,4.618) -46.158,4.595 -45.583,4.595 R15.2 -45.535,4.572 -45.362,4.399 -45.362,4.012 -45.322,3.971 -45.322,3.832 -45.046,3.556 C8.1 C9.2 v1(-44.25,2.54)
  Top Layer w0.5: v1(-45.847,-2.032) -45.593,-2.286 -45.144,-2.286 -45.017,-2.159 C11.1
  DGND w0.305: -45.593,2.413 -45.466,2.54 v1(-44.25,2.54)
  DGND w1: v1(-46.182,4.618) -45.929,4.366 -45.929,2.749 -45.593,2.413 -45.593,0.762 -44.97,0.139 -44.97,-1.319 -45.556,-1.905 -45.593,-1.905 -45.72,-2.032 v1(-45.847,-2.032)
  DGND w1.27: v2(-45.847,-5.969) v1(-45.847,-2.032)
D_N: R17.2 U1.13 | length 54
  Top Layer w0.148: R17.2 -81.669,-1.397 -81.418,-1.146 -81.037,-1.146 v1(-81.026,-1.135) ; v1(-33.909,-7.747) -33.842,-7.68 -33.621,-7.68 -32.826,-6.885 U1.13
  Power w0.148: v1(-81.026,-1.135) -81.022,-1.139 -80.423,-1.139 -80.27,-0.986 -80.046,-0.986 -79.375,-1.657 -79.375,-4.19 -78.037,-5.528 -46.044,-5.528 -46.034,-5.518 -45.66,-5.518 -45.65,-5.528 -38.032,-5.528 -35.873,-7.687 -33.969,-7.687 v1(-33.909,-7.747)
D_P: R16.2 U1.14 | length 54.8
  Top Layer w0.148: R16.2 -81.443,-0.378 -81.029,-0.378 v1(-81.026,-0.381) ; v1(-34.671,-7.086) -34.671,-7.874 -34.163,-8.382 -32.753,-8.382 U1.14
  Power w0.148: v1(-81.026,-0.381) -81.022,-0.385 -80.423,-0.385 -80.27,-0.538 -79.86,-0.538 -78.927,-1.471 -78.927,-4.004 -77.851,-5.08 -37.846,-5.08 -35.687,-7.239 -34.798,-7.239 -34.671,-7.112 v1(-34.671,-7.086)
DEBUG_RX: J1.5 U1.36 | length 10.7
  Top Layer w0.203: U1.36 -7.266,3.275 J1.5
DEBUG_TX: J1.3 U1.37 | length 7.9
  Top Layer w0.203: U1.37 -12.673,4.545 -12.319,4.191 -8.89,4.191 J1.3
DGND: C1.1 C2.1 C3.1 C4.1 C5.1 C6.2 C7.1 C10.1 C13.1 C14.1 C15.1 C16.1 C18.2 C19.1 C20.1 C21.1 C22.1 C23.2 C24.1 D1.1 D2.1 D3.1 J1.4 J2.10 J2.MP1 J2.MP2 J2.MP3 J2.MP4 J2.MP5 J2.MP6 J3.A1_B12 J3.A12_B1 J3.SH1 J3.SH2 J3.SH3 J3.SH4 R3.1 R5.2 R6.1 R8.2 R14.2 R15.1 R18.1 R19.1 R22.2 S1.2 U1.1 U1.40 U1.41 U1.42 U1.43 U1.44 U1.45 U1.46 U1.47 U1.48 U1.49 U2.4 U3.2 U3.3 U4.4 U5.3 U6.1 U7.2 U8.1 U9.4 | length 1.6
  Top Layer w0.203: C18.2 -36.703,5.334 v1@-36.588,5.219 ; v1(-36.574,5.233) -35.772,5.233 C1.1
  other v1: -72.266,-21.261 -79.502,-20.701 -70.231,-19.177 -73.152,-18.923 -82.677,-17.018 -77.47,-17.018 -72.644,-16.129 -64.516,-15.367 -38.989,-14.927 -29.464,-14.224 -30.607,-14.097 -38.989,-13.97 -21.131,-13.564 -18.131,-13.564 -15.131,-13.564 -12.131,-13.564 -9.131,-13.564 -6.131,-13.564 -83.439,-13.335 -71.755,-12.827 -85.598,-12.446 -83.693,-12.192 -74.676,-11.43 -43.307,-11.43 -79.375,-10.922 -39.878,-10.922 -86.614,-10.795 -70.631,-10.639 -67.631,-10.639 -64.631,-10.639 -61.631,-10.564 -58.631,-10.564 -55.631,-10.564 -13.631,-10.564 -10.631,-10.564 -7.631,-10.564 -4.631,-10.564 -45.339,-10.287 -48.768,-10.16 -38.862,-9.398 -35.397,-9.272 13.843,-8.636 -50.673,-8.509 -90.932,-8.001 -47.117,-8.001 -43.18,-8.001 -38.608,-8.001 -36.576,-8.001 -75.167,-7.903 -74.295,-7.903 -30.131,-7.564 -24.131,-7.564 -18.131,-7.564 -4.318,-7.493 -37.949,-6.824 -34.036,-6.604 7.493,-6.604 -78.359,-6.477 -68.326,-6.35 -55.753,-6.35 -73.533,-6.223 -61.214,-6.223 -30.861,-5.842 -36.195,-5.588 14.29,-5.537 -79.629,-5.334 18.161,-5.334 -81.28,-4.699 -88.631,-4.564 -76.631,-4.564 -73.631,-4.564 -70.631,-4.564 -67.916,-4.564 -61.631,-4.564 -58.631,-4.564 -55.631,-4.564 -25.631,-4.564 -22.631,-4.564 -16.631,-4.564 -13.631,-4.564 -40.929,-4.391 -38.989,-4.318 -85.09,-4.064 -80.264,-3.81 -51.435,-3.81 -84.201,-3.683 -81.407,-2.921 10.668,-2.54 -25.527,-2.286 -46.863,-2.159 -24.13,-2.159 -22.86,-2.032 -38.735,-1.778 -66.703,-1.689 -90.131,-1.564 -69.131,-1.564 -62.767,-1.564 -54.131,-1.564 -30.131,-1.564 -12.131,-1.564 -9.131,-1.564 -43.053,-1.524 -39.245,-0.537 -22.606,-0.254 -27.94,-0.127 -38.229,0.021 -49.911,0.508 12.446,0.508 15.494,0.508 -55.525,1.33 -88.631,1.436 -79.631,1.436 -70.631,1.436 -67.662,1.436 -61.624,1.436 -52.631,1.436 -28.631,1.436 -22.631,1.436 -19.631,1.436 -16.631,1.436 -7.631,1.436 -4.631,1.436 -83.312,1.524 -64.848,1.615 -40.896,1.926 -80.264,2.032 17.907,2.54 -85.344,2.794 -22.744,2.977 -27.94,3.175 -26.289,3.175 -24.511,3.302 9.017,3.556 -90.131,4.436 -78.131,4.436 -75.131,4.436 -72.131,4.436 -69.131,4.436 -66.131,4.436 -57.131,4.436 -30.131,4.436 -27.131,4.436 -24.131,4.436 -21.131,4.436 -18.131,4.436 -63.131,4.543 -60.131,4.543 -84.201,4.826 -49.973,4.979 -44.069,5.461 3.302,5.588 18.034,6.096 18.288,7.112 -85.631,7.436 -82.631,7.436 -47.498,8.382 -37.084,8.382 -33.909,8.382 -13.589,8.636 -48.641,8.763 -31.115,8.763
DISP_19: J2.19 R12.1 | length 1.4
  Top Layer w0.203: J2.19 -47.348,-3.96 R12.1@-46.99,-4.318
ESP32_EN: C1.2 J1.1 R1.1 U1.3 | length 26.2
  Top Layer w0.203: R1.1 -34.831,5.242 C1.2 -33.434,5.207 -32.826,5.815 U1.3 -17.553,5.815 v1(-17.526,5.842)
  Power w0.203: v1(-17.526,5.842) -10.795,5.842 J1.1
ESP32_IO0: J1.6 R2.1 S1.1 U1.27 | length 22.8
  Top Layer w0.203: U1.27 -11.846,-8.155 -11.557,-7.866 -10.322,-7.866 S1.1 -9.906,-7.282 v1(-9.906,-5.715)
  Bottom Layer w0.203: v1(-9.906,-5.715) -6.477,-2.286 -6.477,6.604 J1.6
FB: C17.2 R20.2 R22.1 U7.5 | length 4.5
  Top Layer w0.203: U7.5 -39.817,1.032 -39.225,1.624 -38.577,1.624 -38.354,1.847 R22.1 C17.2 -38.192,2.827 R20.2
NetC6_1: C6.1 Q1.2 R7.1 R8.1 | length 4
  Top Layer w0.203: Q1.2 -73.173,-10.148 R7.1
NetJ2_3: J2.3 U1.19 | length 37.2
  Top Layer w0.203: J2.3 -47.71,4.04 -47.563,4.187 -47.476,4.187 -47.357,4.306 -47.357,4.459 -45.43,6.386 v2(-44.847,6.386) ; v2(-28.448,4.826) -28.448,2.955 -28.152,2.659 -28.152,0.788 -28.419,0.521 -28.419,-0.325 -27.375,-1.369 -27.333,-1.369 -26.289,-2.413 -26.289,-5.455 -26.029,-5.715 -26.029,-9.057 U1.19
  Bottom Layer w0.203: v2(-44.847,6.386) -44.795,6.386 -44.704,6.477 -31.064,6.477 -29.413,4.826 v2(-28.448,4.826)
NetJ2_4: J2.4 U1.18 | length 39.7
  Top Layer w0.203: v2(-50.673,4.699) -50.089,4.115 -49.666,4.115 -49.14,3.588 -48.308,3.588 J2.4 ; v2(-29.337,4.191) -29.337,-0.254 -26.951,-2.64 U1.18
  Bottom Layer w0.203: v2(-50.673,4.699) -50.448,4.474 -47.62,4.474 -46.998,5.097 -44.382,5.097 -44.04,4.755 -36.376,4.755 -36.216,4.915 -29.933,4.915 -29.652,4.634 -29.652,4.587 -29.337,4.271 v2(-29.337,4.191)
NetJ2_5: J2.5 U1.17 | length 34.9
  Top Layer w0.203: v2(-49.784,3.556) -49.268,3.04 J2.5 ; v2(-30.353,3.302) -30.353,-0.665 -28.221,-2.797 U1.17
  Bottom Layer w0.203: v2(-49.784,3.556) -49.581,3.353 -30.404,3.353 v2(-30.353,3.302)
NetJ2_6: J2.6 U1.12 | length 29.2
  Top Layer w0.203: J2.6 -48.212,2.492 -47.563,2.492 v2@-46.856,1.785 ; U1.12 -32.226,-5.615 -30.988,-4.377 v2(-30.988,1.905)
  Power w0.203: v2(-46.863,1.778) -46.783,1.778 -46.486,1.481 -46.398,1.481 -45.847,2.032 -44.45,2.032 -44.025,1.607 -44.025,1.099 -41.783,-1.143 -40.831,-1.143 -38.672,1.016 -31.877,1.016 v2(-30.988,1.905)
NetJ2_7: J2.7 U1.6 | length 19.3
  Top Layer w0.203: v1(-49.657,2.032) -49.649,2.04 J2.7 ; v1(-34.036,1.778) -33.956,1.778 -33.729,2.005 U1.6
  Bottom Layer w0.203: v1(-49.657,2.032) -48.895,1.27 -45.042,1.27 -44.846,1.075 -44.45,1.075 -44.255,1.27 -37.973,1.27 -37.465,1.778 v1(-34.036,1.778)
NetJ2_8: J2.8 U1.23 | length 33.7
  Top Layer w0.203: J2.8 -47.71,1.54 -47.563,1.393 -47.476,1.393 -47.357,1.274 -47.357,1.18 -46.99,0.813 v1(-46.99,0.762) ; v1(-20.828,-7.62) -20.828,-7.7 -20.601,-7.927 U1.23
  Bottom Layer w0.203: v1(-46.99,0.762) -41.997,0.762 -41.812,0.577 -41.802,0.568 -41.634,0.568 -41.338,0.626 cw(c-41.178,-0.187) -41.152,0.641 -36.998,0.508 -36.83,0.508 -36.77,0.568 -36.195,1.143 -30.607,1.143 -21.844,-7.62 v1(-20.828,-7.62)
NetJ2_9: J2.9 U1.7 | length 20.8
  Top Layer w0.203: v1(-49.763,1.247) -49.683,1.247 -49.475,1.04 J2.9 ; v1(-34.544,0.508) -34.317,0.735 U1.7
  Bottom Layer w0.203: v1(-49.763,1.247) -49.334,0.819 -49.334,0.566 -47.625,-1.143 -47.311,-1.143 -47.244,-1.21 -46.848,-1.21 -46.654,-1.016 -36.068,-1.016 v1(-34.544,0.508)
NetJ2_11: J2.11 U1.10 | length 21.9
  Top Layer w0.203: v1(-50.419,-0.127) -49.391,-0.127 -49.265,0 -48.3,0 J2.11 ; v1(-35.052,-3.175) -34.952,-3.075 U1.10
  Bottom Layer w0.203: v1(-50.419,-0.127) -50.419,-0.889 -48.133,-3.175 v1(-35.052,-3.175)
NetJ2_12: J2.12 U1.9 | length 19.8
  Top Layer w0.203: v1(-49.41,-1.03) -49.384,-1.004 -49.384,-0.579 -49.265,-0.46 J2.12 ; v1(-34.671,-1.905) -34.591,-1.905 -34.491,-1.805 U1.9
  Power w0.203: v1(-49.41,-1.03) -47.519,-2.921 -45.085,-2.921 -44.577,-2.413 -36.195,-2.413 -35.687,-1.905 v1(-34.671,-1.905)
NetJ2_13: J2.13 U1.8 | length 16.7
  Top Layer w0.203: J2.13 -48.212,-0.912 -47.565,-0.912 -47.46,-0.807 -47.122,-0.807 v1(-47.046,-0.731) ; v1(-36.195,-0.254) -36.115,-0.254 -35.834,-0.535 U1.8
  Power w0.203: v1(-47.046,-0.731) -46.989,-0.788 -46.71,-0.788 -46.482,-1.016 -42.341,-1.016 -41.909,-1.448 -40.705,-1.448 -40.4,-1.143 -37.084,-1.143 v1(-36.195,-0.254)
NetJ2_16: J2.16 U1.11 | length 19.9
  Top Layer w0.203: v1(-49.911,-2.54) -49.871,-2.5 -48.3,-2.5 J2.16 ; v1(-34.796,-4.383) -34.798,-4.385 -34.798,-4.445 -34.698,-4.345 U1.11
  Power w0.203: v1(-49.911,-2.54) -48.768,-3.683 -35.497,-3.683 v1(-34.796,-4.383)
NetJ2_17: J2.17 R14.1 U1.21 | length 39.2
  Top Layer w0.203: v1(-50.673,-3.175) -49.869,-3.175 -49.654,-2.96 J2.17 -47.197,-2.96 -46.855,-3.302 R14.1@-46.83,-3.302 ; U1.21 -22.987,-9.559 v1(-22.987,-11.43)
  Bottom Layer w0.203: v1(-50.673,-3.175) -50.673,-5.715 -44.45,-11.938 -23.495,-11.938 v1(-22.987,-11.43)
NetJ2_18: J2.18 U1.20 | length 31.6
  Top Layer w0.203: v1(-49.663,-3.849) -49.657,-3.849 -49.268,-3.46 J2.18 ; U1.20 -24.411,-10.895 v1(-24.384,-10.922)
  Bottom Layer w0.203: v1(-49.663,-3.849) -49.663,-4.439 -44.196,-9.906 -27.853,-9.906 -26.837,-10.922 v1(-24.384,-10.922)
NetJ3_A5: J3.A5 R19.2 | length 5.1
  Top Layer w0.203: J3.A5 -83.205,0.615 -82.511,1.309 -82.511,1.809 -82.288,2.032 R19.2
NetJ3_B5: J3.B5 R18.2 | length 4.8
  Top Layer w0.203: J3.B5 -84.957,-2.385 -84.948,-2.376 -83.722,-2.376 -82.288,-3.81 R18.2
NetL1_1: L1.1 U7.3 | length 3.5
  Top Layer w0.635: -42.291,4.191 -42.291,4.171 -41.717,3.597 U7.3
  Top Layer w1.27: L1.1 -42.437,5.881 -42.437,4.833 -42.037,4.433 -42.037,3.917
NetR3_2: R3.2 U1.26 | length 2.6
  Top Layer w0.203: U1.26 -16.791,-11.657 -16.637,-11.811 -16.67,-11.811 R3.2
NetR4_1: R4.1 R5.1 U1.15 | length 3.5
  Top Layer w0.203: R4.1 R5.1 -30.607,-9.559 U1.15
NetR6_2: R6.2 U1.16 | length 2.3
  Top Layer w0.203: U1.16 -29.464,-9.432 R6.2
NetR7_2: R7.2 U1.39 | length 69.3
  Top Layer w0.203: R7.2 -73.025,-9.025 -70.5,-6.5 -70.5,-6.472 -68.199,-4.171 -68.199,3.523 v1(-66.675,5.047) ; v1(-17.018,7.112) -15.053,7.112 U1.39
  Bottom Layer w0.203: v1(-66.675,5.047) -66.675,5.08 -64.643,7.112 v1(-17.018,7.112)
NetR21_2: R21.2 U7.1 | length 5.9
  Top Layer w0.203: R21.2 -43.18,2.019 -42.882,2.316 -42.243,2.316 v1(-42.226,2.334) ; U7.1 -39.817,3.032 -39.37,2.585 v1(-39.37,2.286)
  Bottom Layer w0.203: v1(-42.226,2.334) -41.165,2.334 -41.086,2.413 -39.577,2.413 -39.45,2.286 v1(-39.37,2.286)
NetU1_22: U1.22
NetU1_24: U1.24 U5.2 | length 66
  Top Layer w0.203: v1(-76.885,-21.083) -76.885,-21.387 -76.448,-21.824 -76.123,-21.824 ; v1(-19.337,-11.177) -19.337,-9.411 U1.24
  Power w0.203: v1(-76.885,-21.083) -70.251,-14.449 -35.589,-14.449 -35.56,-14.478 -32.525,-14.478 -32.301,-14.703 -21.053,-14.703 -19.304,-12.954 -19.304,-11.176 -19.305,-11.177 v1(-19.337,-11.177)
NetU1_25: U1.25
NetU1_28: U1.28
NetU1_29: U1.29
NetU1_30: U1.30
NetU1_31: U1.31
NetU1_32: U1.32 U3.1 | length 66.6
  Top Layer w0.203: U3.1 -73.675,-12.348 -73.675,-11.826 v1(-73.533,-11.684) ; v1(-21.336,-1.905) -21.256,-1.905 -21.156,-1.805 U1.32
  Power w0.203: v1(-73.533,-11.684) -53.213,-11.684 -52.324,-12.573 -28.067,-12.573 -21.336,-5.842 v1(-21.336,-1.905)
NetU1_33: U1.33 U3.4 | length 69.7
  Top Layer w0.203: U3.4 -74.549,-14.075 -74.549,-13.462 -74.401,-13.462 v1(-74.399,-13.464) ; v1(-16.637,-0.508) -15.053,-0.508 U1.33
  Power w0.203: v1(-74.399,-13.464) -22.735,-13.464 -21.209,-11.938 -21.209,-10.795 -19.431,-9.017 -19.431,-3.302 v1(-16.637,-0.508)
NetU1_38: U1.38
SCL: J2.20 R9.2 U1.5 U9.2 | length 79.7
  Top Layer w0.203: v1(-87.951,-14.012) -87.909,-13.97 -87.884,-13.97 -87.659,-14.195 -87.235,-14.195 U9.2 ; v1(-54.229,3.048) -53.34,2.159 -53.34,-2.667 -51.547,-4.46 J2.20 ; R9.2 v1(-33.909,2.667) -33.434,2.667 -32.826,3.275 U1.5
  Power w0.203: v1(-87.951,-14.012) -87.358,-14.605 -79.502,-14.605 -75.057,-10.16 -64.516,-10.16 v1(-62.738,-8.382) ; v1(-62.865,-4.318) -61.468,-2.921 -61.468,-2.794 -55.683,2.991 -54.286,2.991 v1(-54.229,3.048)
  Bottom Layer w0.203: v1(-62.865,-4.318) -62.865,-4.398 -62.738,-4.525 v1(-62.738,-8.382) ; v1(-54.229,3.048) -34.313,3.048 -33.932,2.667 v1(-33.909,2.667)
SCL_TS: R23.2 U1.35 U2.2 U4.2 | length 46.8
  Top Layer w0.203: U1.35 -14.926,1.905 v1(-13.589,1.905) -12.794,1.905 R23.2 ; U4.2 15.656,-6.115 16.002,-6.461 ; v1(15.875,4.572) 15.875,5.267 15.923,5.315 U2.2
  Power w0.203: v1(-13.589,1.905) -13.335,2.159 -4.826,2.159 -1.905,5.08 v1(11.684,5.08) ; v1(15.875,4.572) 16.764,3.683 16.764,-5.969 v1(16.002,-6.731)
  Bottom Layer w0.203: v1(11.684,5.08) 15.367,5.08 v1(15.875,4.572)
SDA: J2.22 R10.2 U1.4 U9.1 | length 85.2
  Top Layer w0.203: v1(-87.249,-12.446) -87.249,-13.395 -87.201,-13.443 U9.1 ; v1(-55.372,4.064) -55.372,1.854 -55.046,1.528 -55.046,-4.136 -53.722,-5.46 J2.22 ; R10.2 v1(-33.782,3.937) -33.434,3.937 -32.826,4.545 U1.4
  Power w0.203: v1(-87.249,-12.446) -85.725,-13.97 -81.407,-13.97 -80.391,-12.954 -80.391,-10.668 -78.105,-8.382 v1(-67.437,-8.382) ; v1(-67.183,-3.429) -67.126,-3.372 -67.126,-3.118 -59.944,4.064 -57.436,4.064 -57.329,3.957 -56.444,3.957 -56.337,4.064 v1(-55.372,4.064)
  Bottom Layer w0.203: v1(-67.437,-8.382) -67.437,-3.763 -67.183,-3.509 v1(-67.183,-3.429) ; v1(-55.372,4.064) -44.669,4.064 -44.542,3.937 v1(-33.782,3.937)
SDA_TS: R24.2 U1.34 U2.1 U4.1 | length 47.1
  Top Layer w0.203: U1.34 -12.694,0.735 R24.2 -12.667,-0.033 v1(-12.319,-0.381) ; v1(14.351,6.096) 14.36,6.105 15.927,6.105 U2.1 ; U4.1@15.456,-5.315 15.477,-5.315 U4.1@15.516,-5.275 ; v1(15.494,-4.445) 15.525,-4.476 15.525,-5.284 U4.1
  Power w0.203: v1(-12.319,-0.381) -2.921,-0.381 1.016,3.556 5.842,3.556 6.477,2.921 11.176,2.921 v1(14.351,6.096) 14.351,-3.302 v1(15.494,-4.445)
USB_N: D2.2 J3.A6 J3.B7 R16.1 | length 4.8
  Top Layer w0.381: J3.B7 J3.A6 -84.521,-0.385 D2.2@-84.201,-0.065 ; D2.2 D2.2@-84.201,-0.065 ; R16.1@-82.39,-0.127 -84.099,-0.127 -84.152,-0.075 -84.192,-0.075 D2.2@-84.201,-0.065
USB_P: D3.2 J3.A7 J3.B6 R17.1 | length 4.9
  Top Layer w0.381: J3.B6 J3.A7 -84.775,-0.885 D3.2@-84.201,-1.459 ; D3.2 D3.2@-84.201,-1.459 ; R17.1@-82.39,-1.397 -84.099,-1.397 -84.152,-1.449 -84.192,-1.449 D3.2@-84.201,-1.459
pads on no net: J2.1 J2.2 J2.24 J3. J3.A8 J3.B8

## Polygon pours and split planes (outlines as drawn)
DGND on Top Layer "DGND_L01_P041" (solid, remove dead copper, pour order 41): -97.566,15.41 -2.667,15.41 -2.667,-25.103 -68.453,-24.638 -80.074,-23.114 -78.105,-23.114 -78.105,-6.096 -94.01,-6.096
DGND on Top Layer "Top Layer-DGND 1" (hatched 90Degree grid 1.016 track 0.203, pour order 31): -2.946,-15.646 16.976,-15.646 20.472,-12.15 20.472,5.927 16.976,9.423 -2.946,9.423
DGND on Top Layer "Top Layer-DGND" (hatched 45Degree grid 1.016 track 0.203, remove dead copper, pour order 25): -93.499,-8.886 -93.499,-6.172 -78.105,-6.172 -78.105,-24.28 -92.323,-10.063
3v3_dig@2A on Top Layer "3V3_DIG@2A_L01_P026" (solid, remove dead copper, pour order 26): -31.877,7.747 -34.29,7.747 -34.544,8.001 -40.64,8.001 -41.148,7.493 -41.148,4.953 -40.894,4.699 -39.243,4.699 -38.862,4.318 -38.862,3.683 -38.481,3.302 -36.957,3.302 -36.449,2.794 -36.449,2.54 -35.941,2.032 -35.687,2.032 -35.306,2.413 -35.306,4.318 -35.56,4.572 -37.338,4.572 -37.719,4.953 -37.719,5.715 -37.592,5.842 -35.306,5.842 -34.544,6.604 -31.877,6.604
DGND on DGND "DGND_L02_P033" (solid, remove dead copper, pour order 33): -97.536,15.494 20.955,15.494 25.654,10.795 25.654,-19.812 20.447,-25.019 -93.98,-25.019 -97.536,-21.463
DGND on DGND "DGND_L02_P032" (solid, remove dead copper, pour order 32): -97.566,15.41 -2.667,15.41 -2.667,-25.103 -68.453,-24.638 -80.073,-23.114 -78.105,-23.114 -78.105,-6.096 -94.01,-6.096
DGND on DGND "DGND-DGND" (hatched 90Degree grid 1.016 track 0.203, pour order 34): -3.327,-15.646 16.976,-15.646 20.472,-12.15 20.472,5.927 16.976,9.423 -3.327,9.423
DGND on DGND "Top Layer-DGND" (hatched 45Degree grid 1.016 track 0.203, remove dead copper, pour order 22): -93.499,-8.886 -93.499,-6.172 -78.105,-6.172 -78.105,-24.28 -92.323,-10.063
DGND on Bottom Layer "DGND_L04_P040" (solid, remove dead copper, pour order 40): -97.566,15.41 -2.667,15.41 -2.667,-25.103 -68.453,-24.638 -80.073,-23.114 -78.105,-23.114 -78.105,-6.096 -94.01,-6.096
DGND on Bottom Layer "Bottom Layer-DGND" (hatched 90Degree grid 1.016 track 0.203, pour order 37): -2.692,-15.646 16.976,-15.646 20.472,-12.15 20.472,5.927 16.976,9.423 -2.692,9.423
DGND on Bottom Layer "Top Layer-DGND" (hatched 90Degree grid 1.016 track 0.203, remove dead copper, pour order 24): -93.499,-8.886 -93.499,-6.172 -78.105,-6.172 -78.105,-24.28 -92.323,-10.063
DGND on Power "Top Layer-DGND" (hatched 90Degree grid 1.016 track 0.203, remove dead copper, pour order 23): -93.37,-9.292 -93.37,-6.579 -78.105,-6.579 -78.105,-24.558 -92.194,-10.469
DGND on Power "DGND_L03_P039" (solid, remove dead copper, pour order 39): -97.566,15.41 -2.667,15.41 -2.667,-25.103 -68.453,-24.638 -78.105,-15.748 -78.105,-6.096 -94.01,-6.096
DGND on Power "DGND_L03_P036" (solid, remove dead copper, pour order 36): -97.536,15.494 20.955,15.494 25.654,10.795 25.654,-19.812 20.447,-25.019 -93.98,-25.019 -97.536,-21.463
DGND on Power "Power-DGND" (hatched Horizontal grid 1.016 track 0.203, pour order 35): -2.692,-15.646 16.976,-15.646 20.472,-12.15 20.472,5.927 16.976,9.423 -2.692,9.423

## Keep-outs
Keep-Out Layer:
  lines w0.254: -93.853,-9.335 -93.853,-6.223 -93.853,-3.111 -93.853,0 -93.853,3.111 -92.647,4.318 -87.439,9.525 -43.434,9.525 -7.112,9.525 17.018,9.525 20.574,5.969 20.574,0 20.574,-12.192 17.018,-15.748 -7.112,-15.748 -16.637,-15.748 -62.357,-15.748 -69.723,-23.114 -80.074,-23.114 -87.439,-15.748 -92.647,-10.541 -93.853,-9.335

## Silkscreen, mask and mechanical layers (free items; w line width, h text height)
Top Overlay:
  circle w0.254: c3.175,-0.889 r3.5
  circle w0.254: c-82.55,-8.382 r3.5
  circle w0.254: c-74.93,-0.381 r3.25
  circle w0.254: c-74.93,-0.381 r5.305
  text "INCUNEST_SENSBOARD V4.A" at -88.011,5.334 h1.52 r0.36
Bottom Overlay:
  text "INCUNEST_SENSBOARD V4.A" at -52.07,5.969 h1.52 r0.36

## Text inside footprints (layer, text, board x,y; h text height)
J3: Mechanical 13 "PCB EDGE" at -93.436,-6.135 h0.81 r270